# Altium PCB MPCButton.PcbDoc
Units mil, origin at the board's own origin, x right, y up, seen from the top; angles counter-clockwise.
Board outline 1181.1 x 1181.1 mil, 2 copper layers (Top Layer, Bottom Layer); 5 components, 6 nets, 12 pads, 2 vias.
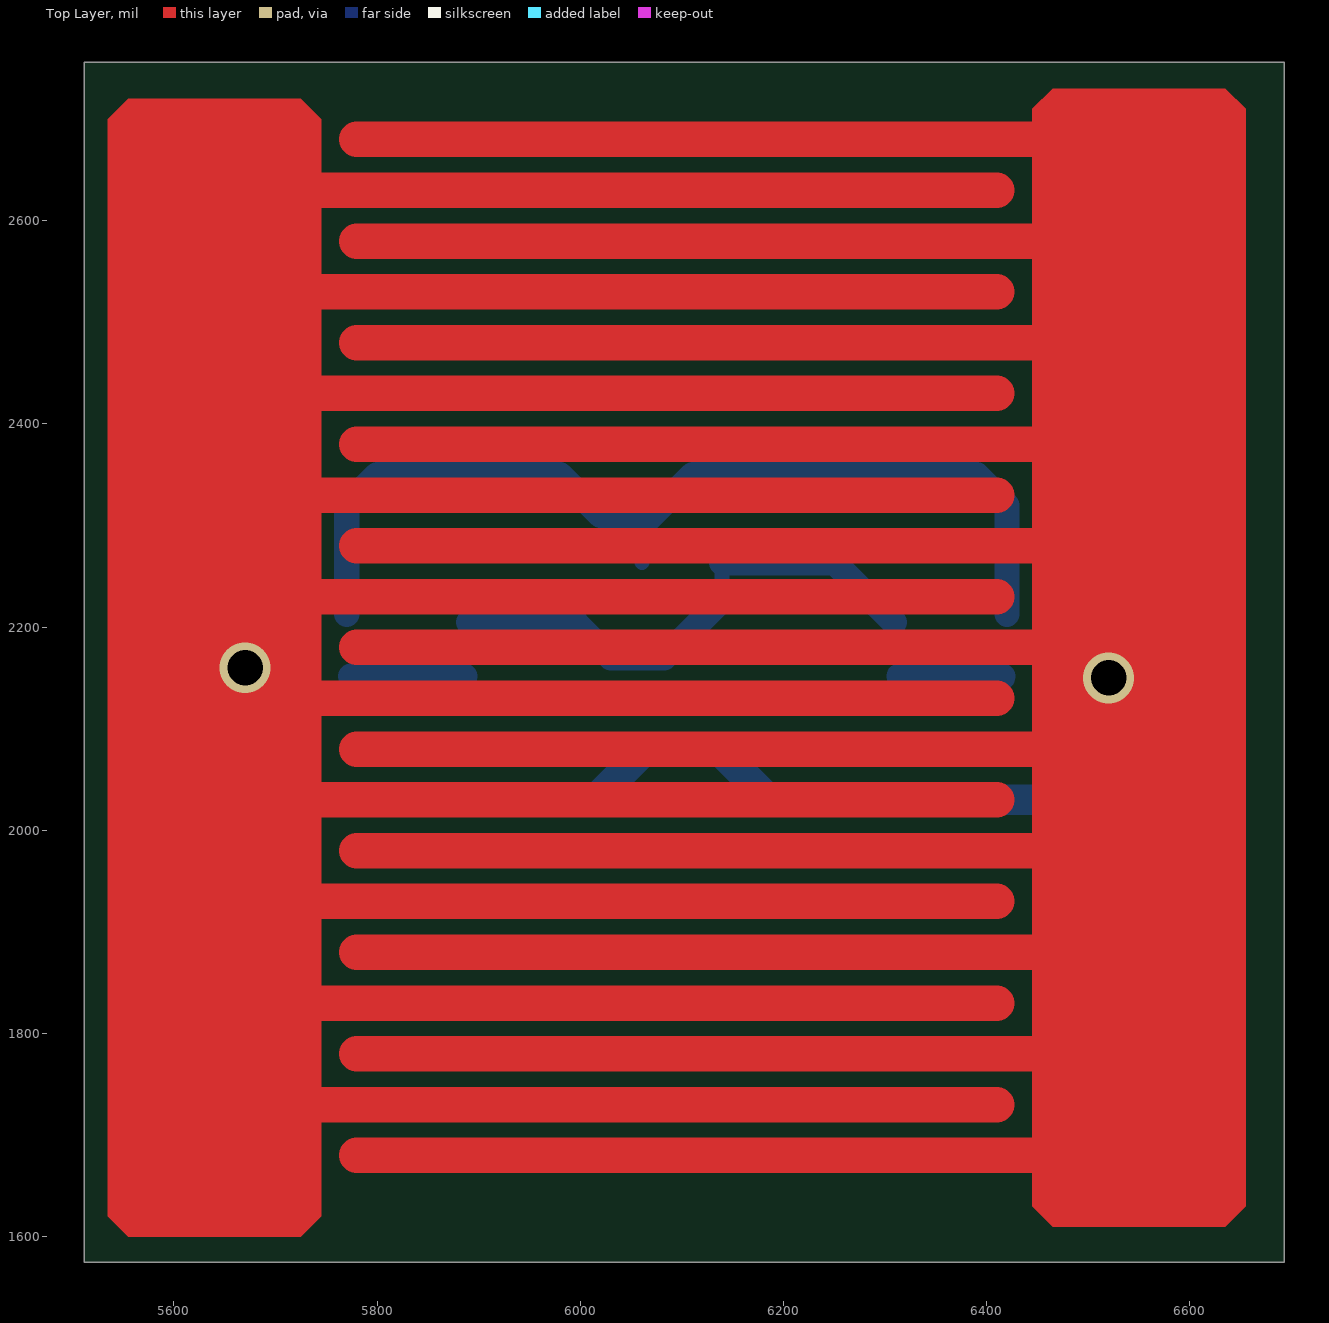
[diagram p0: Top Layer view]
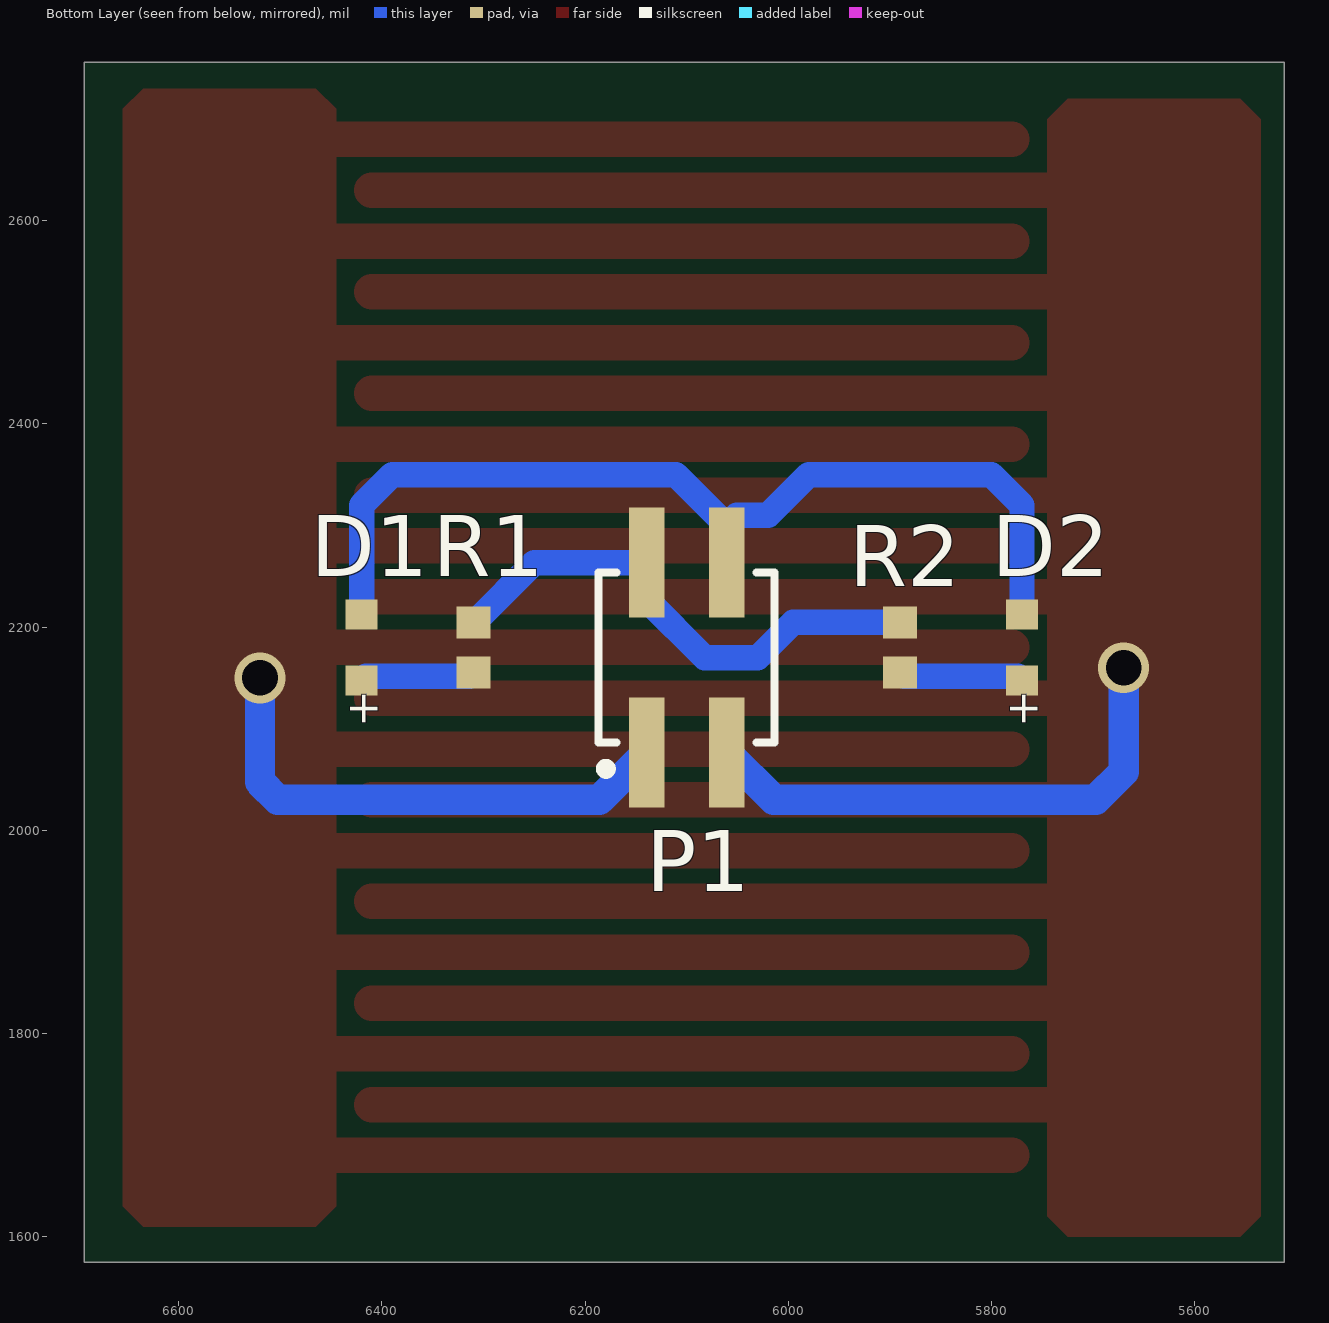
[diagram p1: Bottom Layer view, seen from below]
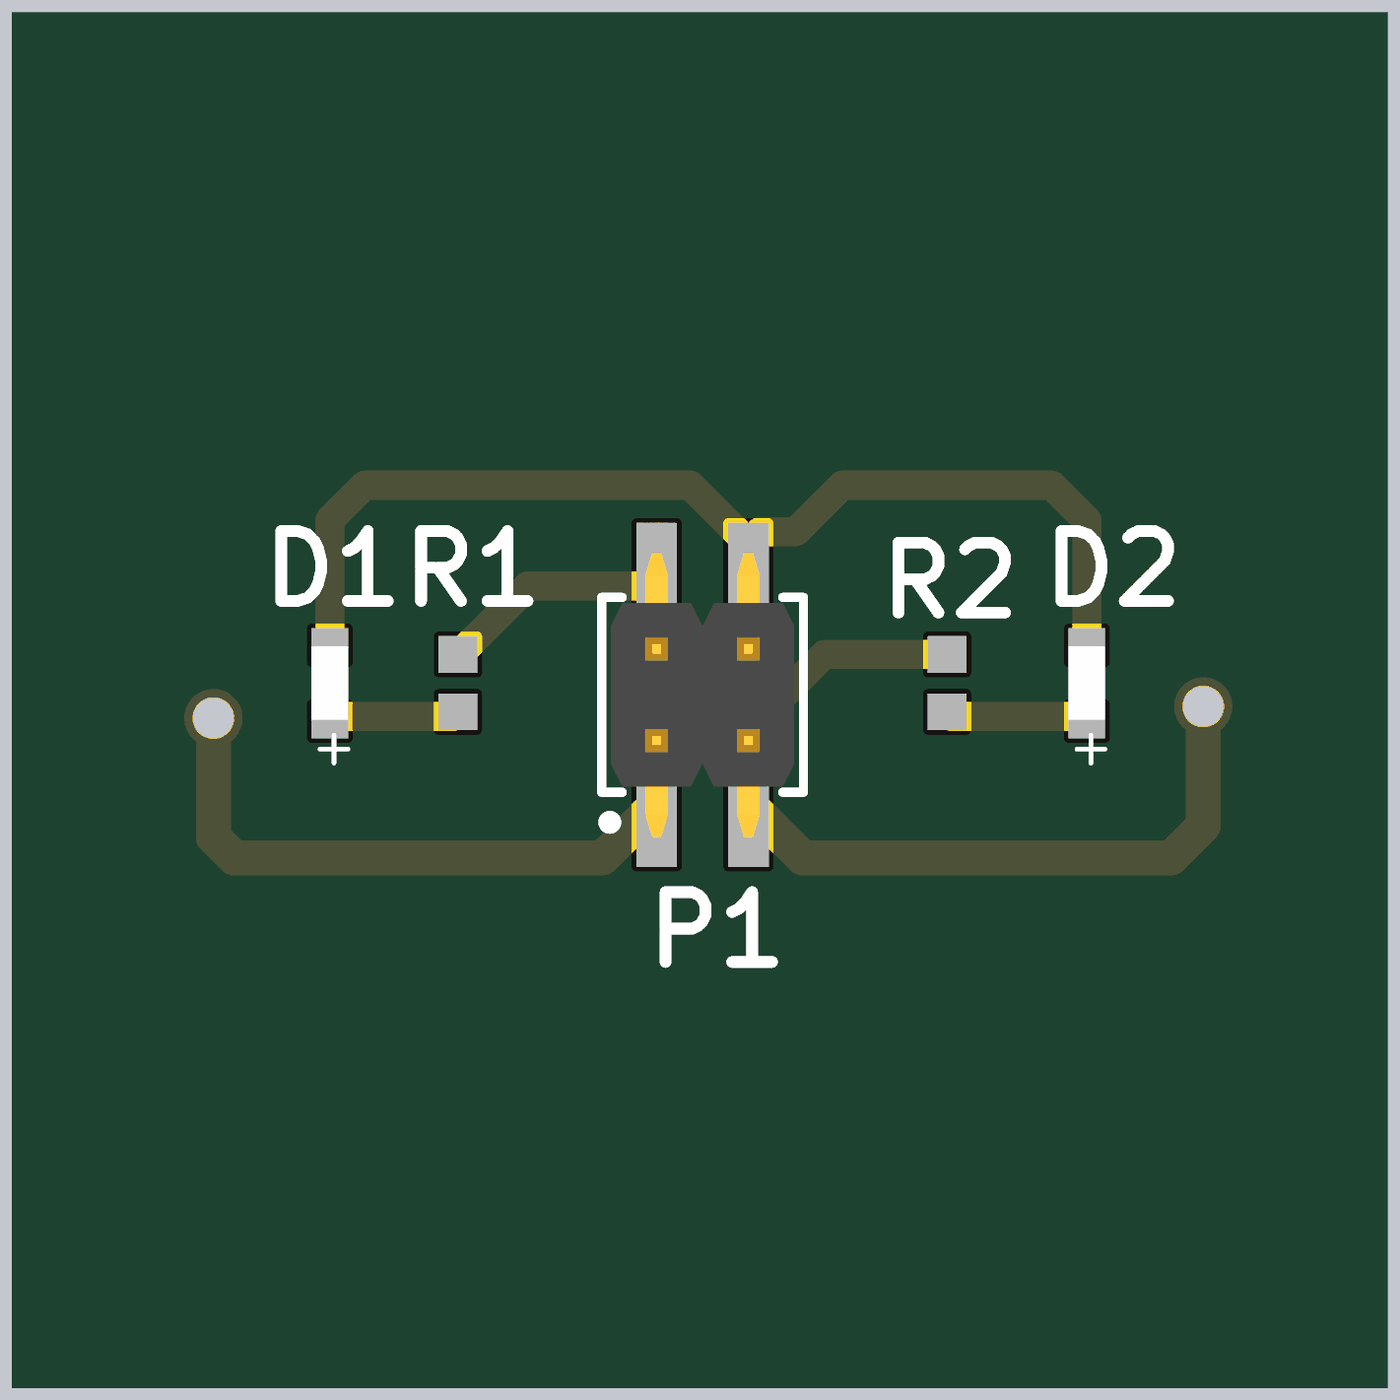
[diagram p2: 3D render of the assembled board from below, using the file's embedded part models]

## Layer stack, top to bottom
Top Solder: solder mask 0.4, Solder Resist, Dk 3.5
Top Layer: signal copper 1.4
Dielectric 1: dielectric 12.6, FR-4, Dk 4.8
Bottom Layer: signal copper 1.4
Bottom Solder: solder mask 0.4, Solder Resist, Dk 3.5

## Board outline
5511.81,1574.8 5511.81,2755.91 6692.91,2755.91 6692.91,1574.8

## Design rules (kind name [scope] priority, off if disabled: settings)
Clearance [All] p1: gap=10 ignorepadtopadclearanceinfootprint=FALSE
PolygonConnect [All] p1: connectstyle=Direct reliefconductorwidth=10 reliefentries=4 polygonreliefangle="90 Angle" airgapwidth=10
RoutingVias [All] p1: holewidth=28 width=50 viastyle="Through Hole" minholewidth=28 minwidth=50 maxholewidth=28 maxwidth=50
SolderMaskExpansion [All] p1: expansion=4 istentingtop=FALSE
Width [All] p1: maxlimit=50 minlimit=10 preferedwidth=10 minimp=50.000000 maximp=50.000000 favimp=50.000000
30 further rules are at their usual default settings.

## Components (designator, comment, footprint, x,y, rotation, side; value= is the part's Value field where it differs from the comment)
D1 "Red, 2V, 120°" WL-SMCC_0603_150060xx73220 6420,2180 r270 bottom
D2 "Red, 2V, 120°" WL-SMCC_0603_150060xx73220 5770,2180 r270 bottom
P1 "62100421921" 62100421921 6100,2170 r180 bottom
R1 "220" RESC0603(1608)_N 6310,2180 r270 bottom
R2 "220" RESC0603(1608)_N 5890,2180 r270 bottom

## Footprints (in the part's own frame and the unit in brackets; to place one, negate y for a bottom-side part, rotate by r counter-clockwise, add the part's x,y. Pads: shape width x height; smd on the part's side, far side on the other; paste and mask are expansions set on the pad)
62100421921 [mm] "Pin Header, pitch 2.00 mm, SMD, Vertical, dual row, 4p"
  rect 0.89x2.75 smd: 1(-1,-2.375) 2(-1,2.375) 3(1,-2.375) 4(1,2.375)
  silkscreen extent -2.2,-2.9 2.2,2.12, body extent -2,-3.1 2,3.1, height 6.7
RESC0603(1608)_N [mm] "Chip Resistor, 2-Leads, Body 1.60x0.80mm, IPC High Density"
  rect 0.8x0.85 smd: 1(-0.625,0) 2(0.625,0)
  body extent -0.87,-0.48 0.87,0.48, height 0.45
WL-SMCC_0603_150060xx73220 [mm] "SMD Mono-color Chip LED Compact, body 1.60 x 0.80 mm"
  rect 0.75x0.8 smd: 1(-0.825,0) 2(0.825,0)
  body extent -0.8,-0.4 0.8,0.4, height 0.19

## Part data
D1 D2: library part 150060RS73220, "WL-SMCC Mono-color Chip LED Compact, SMT, size 0603, Red, 2V, 120°", Case/Size Code=0603, Emitting Color=Red, Forward Voltage=2V, Manufacturer="Wurth Elektronik", Operating Temperature Max=85°C, Operating Temperature Min=-40°C, Category="Signal LEDs", Chip Technology=AlInGaP, ComponentLink1Description="Website Link", ComponentLink1URL=https://www.we-online.com/redexpert/article/150060RS73220?ad, ComponentLink2Description="Datasheet Link", ComponentLink2URL=https://www.we-online.com/redexpert/spec/150060RS73220?ad, Dominant Wavelength=624nm, Height=0.2mm, Length=1.6mm, Luminous Intensity=90mcd, Manufacturer Part Number=150060RS73220, Match Code=WL-SMCC, Mount="Surface Mount", Packaging="Tape and Reel", Peak Wavelength=632nm, Viewing Angle=120°, Width=0.8mm
P1: "WR-PHD Pin Header, SMT, Vertical, pitch 2mm, 2 Row, 4P", Contact Resistance=20mOhm, Manufacturer="Wurth Elektronik", Operating Temperature Max=105°C, Operating Temperature Min=-40°C, Rated Current=2A, Withstanding Voltage=500V, Working Voltage=200V, Category="Board-to-Board Connectors", ComponentLink1Description="Website Link", ComponentLink1URL=https://www.we-online.com/redexpert/article/62100421921?ad, ComponentLink2Description="Datasheet Link", ComponentLink2URL=https://www.we-online.com/redexpert/spec/62100421921?ad, Gender="Pin Header", Manufacturer Part Number=62100421921, Match Code=WR-PHD, Mount="Surface Mount", Number of Pins=4, Number of Rows=2, Orientation=Vertical, Packaging=Tube, Pitch=2mm, System=Connector
R1 R2: library part RES, "RES"

## Via types
v1: diameter 50, hole 35, Top Layer to Bottom Layer, tented both sides, 2 vias

## Nets (pads, with @x,y where several pads share a name; then routed paths per layer and width w, separated by ;. In a path a pad name is that pad's centre, name@x,y a point inside that pad or via, vN(x,y) a via of type N, cw(c..) or ccw(c..) an arc to the next point about the centre after c; other vN are vias at no path point)
Btn_Output: P1.3 | length 7323.7
  Top Layer w35: 5730,1730 6410,1730 ; 5730,1830 6410,1830 ; 5730,1930 6410,1930 ; 5730,2030 6410,2030 ; 5730,2130 6410,2130 ; 5730,2230 6410,2230 ; 5730,2330 6410,2330 ; 5730,2430 6410,2430 ; 5730,2530 6410,2530 ; 5730,2630 6410,2630
  Bottom Layer w30: v1(5670,2160) 5670,2057.57 5697.57,2030 6014.13,2030 P1.3
Btn_Power: P1.1 | length 7989.6
  Top Layer w35: 5780,1680 6460,1680 ; 5780,1780 6460,1780 ; 5780,1880 6460,1880 ; 5780,1980 6460,1980 ; 5780,2080 6460,2080 ; 5780,2180 6460,2180 ; 5780,2280 6460,2280 ; 5780,2380 6460,2380 ; 5780,2480 6460,2480 ; 5780,2580 6460,2580 ; 5780,2680 6460,2680
  Bottom Layer w30: P1.1 6185.87,2030 6502.43,2030 6520,2047.57 v1(6520,2150)
LED_GND: D1.1 D2.1 P1.4 | length 967.8
  Bottom Layer w15: P1.4@6050.61,2310.14 6060.63,2300.12 P1.4
  Bottom Layer w25: D2.1 5770,2320 5800,2350 5980,2350 6019.86,2310.14 P1.4@6050.61,2310.14 ; P1.4@6060.63,2300.12 6110.51,2350 6390,2350 6420,2320 D1.1
LED_ON: P1.2 R1.1 R2.1 | length 518.9
  Bottom Layer w15: P1.2@6139.37,2226.89 P1.2 ; R1.1@6309.02,2204.61 R1.1
  Bottom Layer w25: R2.1 5995.39,2204.61 6030,2170 6082.48,2170 P1.2@6139.37,2226.89 ; P1.2 6250.12,2263.5 R1.1@6309.02,2204.61
NetD1_2: D1.2 R1.2 | length 113.3
  Bottom Layer w15: R1.2 R1.2@6313.94,2151.46 ; D1.2@6416.06,2151.46 D1.2
  Bottom Layer w25: R1.2@6313.94,2151.46 D1.2@6416.06,2151.46
NetD2_2: D2.2 R2.2 | length 123.3
  Bottom Layer w15: D2.2 D2.2@5773.94,2151.46 ; R2.2@5886.06,2151.46 R2.2
  Bottom Layer w25: D2.2@5773.94,2151.46 R2.2@5886.06,2151.46

## Other copper
Top Layer:
  region net Btn_Output: 5555,2720 5725,2720 5745,2700 5745,1620 5725,1600 5555,1600 5535,1620 5535,2700
  region net Btn_Power: 6465,2730 6635,2730 6655,2710 6655,1630 6635,1610 6465,1610 6445,1630 6445,2710

## Silkscreen, mask and mechanical layers (free items; w line width, h text height)
Mechanical 1:
  the board outline again, w10

## Text inside footprints (layer, text, board x,y; h text height)
D1: Bottom Overlay "+" at 6404.25,2101.26 h31.5 r270
D2: Bottom Overlay "+" at 5754.25,2101.26 h31.5 r270